# Allegro board HY_UART_422_V10_210901.brd
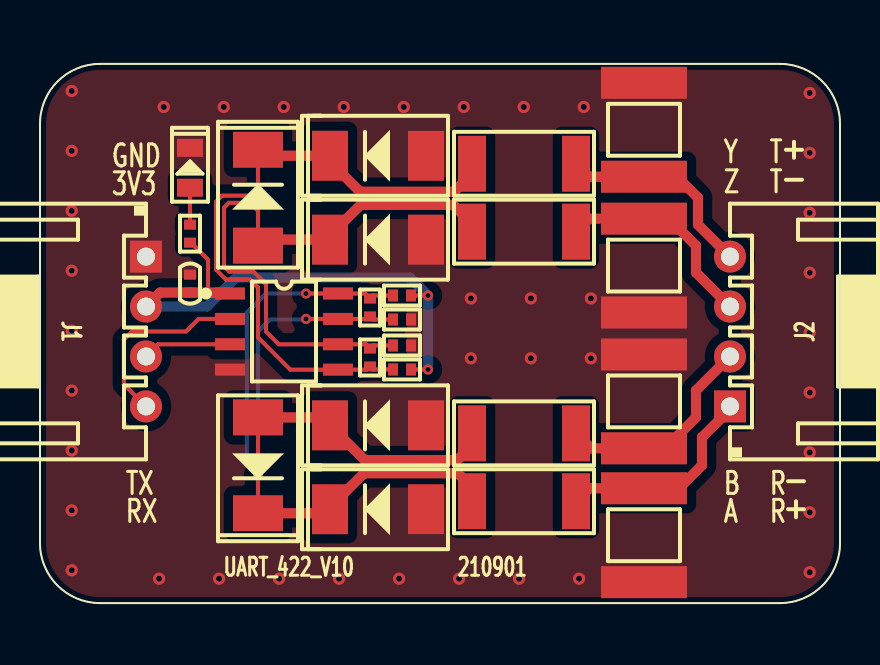
[diagram p0: board, top side]
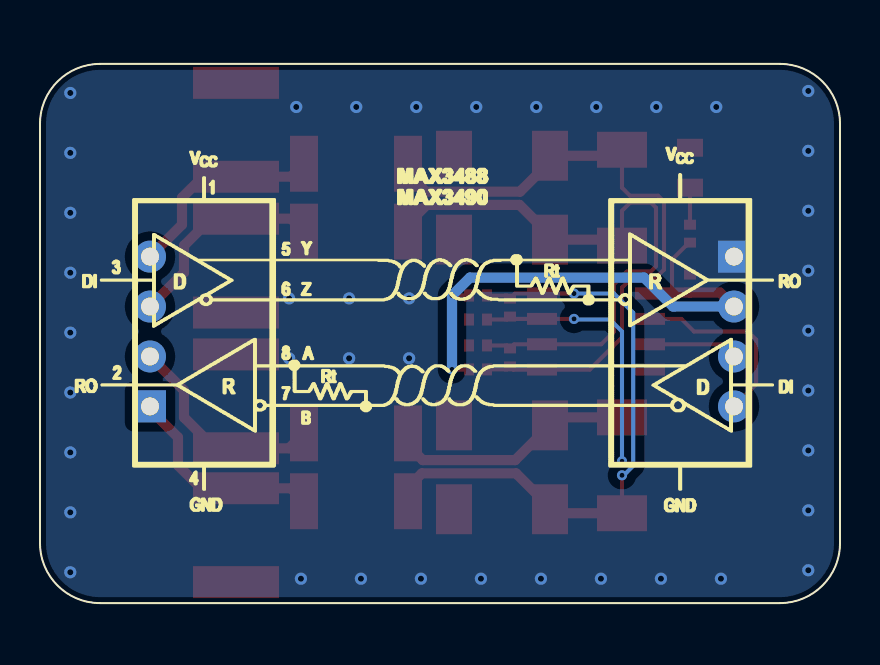
[diagram p1: board, bottom side, seen from below]

Outline 40 x 27 mm; copper layers: TOP, BOTTOM. Coordinates in mm from the lower left corner of the outline.
Outline path: 0,24 arc(0.88,26.12) 3,27 37,27 arc(39.12,26.12) 40,24 40,3 arc(39.12,0.88) 37,0 3,0 arc(0.88,0.88) 0,3 0,24

## Design rules (mm)
constraint set DEFAULT: min track width 0.203, pair gap 0.203

## Placement (name value [footprint] x y rotation side)
C1  100nF_50V  [C0402]  7.5 16 270 top
D1  GREEN-0805  [LED0805]  7.5 21.8 90 top
D2  SMBJ7.0CA  [DO-214AA]  16.9 8.9 0 top
D3  SMBJ7.0CA  [DO-214AA]  10.9 6.9 90 top
D4  SMBJ7.0CA  [DO-214AA]  16.9 4.7 0 top
D5  SMBJ7.0CA  [DO-214AA]  16.9 18.2 0 top
D6  SMBJ7.0CA  [DO-214AA]  10.9 20.3 270 top
D7  SMBJ7.0CA  [DO-214AA]  16.9 22.4 0 top
GDT1  4532-091-LF  [SMD4532]  30.2 10.1 90 top
GDT2  4532-091-LF  [SMD4532]  30.2 3.4 90 top
GDT3  4532-091-LF  [SMD4532]  30.2 16.9 270 top
GDT4  4532-091-LF  [SMD4532]  30.2 23.7 270 top
J1  -  [HX25035-4WA]  5.3 13.6 270 top
J2  -  [HX25035-4WA]  34.5 13.6 90 top
NOREF  -  []  0 0 90 top
NOREF#2  -  []  0 0 0 top
R1  4.7K  [R0402]  7.5 18.5 90 top
R2  10R  [R2010]  24.2 8.5 0 top
R3  4.7K  [R0402]  18.1 14.2 180 top
R4  120R/NI  [R0402]  16.5 14.8 90 top
R5  4.7K  [R0402]  18.1 15.4 0 top
R6  10R  [R2010]  24.2 5.1 0 top
R7  10R  [R2010]  24.2 18.6 0 top
R8  4.7K  [R0402]  18.1 12.9 180 top
R9  120R/NI  [R0402]  16.5 12.3 270 top
R10  4.7K  [R0402]  18.1 11.7 0 top
R11  10R  [R2010]  24.2 22 0 top
U1  MAX3488EESA  [SOIC8]  12.2 13.6 270 top

## Library data of the parts
C1 = CAP NP
D1 = LED_1
D2-D7 = P6SMB_1
GDT1-GDT4 = BA301N
J1 J2 = CONN RCPT 4
R1-R11 = R_Generic
U1 = MAX3485ESA_0

## Footprints (pads in the part's own frame, mm; a bottom-side part is the same pattern mirrored in y, then rotated)
C0402
  rect 0.5x0.6 smd: 1(-0.45,0) 2(0.45,0)
DO-214AA
  rect 1.8x2.5 smd: 1(2.4,0) 2(-2.4,0)
HX25035-4WA
  rect 1.6x1.6 hole 0.9: 1(-3.75,0)
  round 1.6 hole 0.9: 2(-1.25,0) 3(1.25,0) 4(3.75,0)
LED0805
  rect 0.9x1.3 smd: 1(-1,0) 2(1,0)
R0402
  rect 0.5x0.6 smd: 1(-0.45,0) 2(0.45,0)
R2010
  rect 1.4x2.8 smd: 1(-2.6,0) 2(2.6,0)
SMD4532
  rect 1.6x4.3 smd: 1(-2.349,0) 2(2.349,0)
SOIC8
  rect 0.6x1.5 smd: 1(-1.9,-2.7) 2(-0.63,-2.7) 3(0.64,-2.7) 4(1.91,-2.7) 5(1.91,2.7) 6(0.64,2.7) 7(-0.63,2.7) 8(-1.9,2.7)

## Nets
GND: C1.1 D1.2(CATHODE) D2.1 D4.1 D5.1 D7.1 GDT1.2 GDT2.1 GDT3.2 GDT4.1 J1.1 R3.1 R8.1 U1.4
VCC_3.3V: C1.2 J1.2 R1.1 R5.2 R10.2 U1.1
A: GDT2.2 J2.1 R6.2
B: GDT1.1 J2.2 R2.2
RS422_A: D3.2 D4.2 R4.2 R5.1 R6.1 U1.8
RS422_B: D2.2 D3.1 R2.1 R3.2 R4.1 U1.7
RS422_Y: D6.2 D7.2 R9.2 R10.1 R11.1 U1.5
RS422_Z: D5.2 D6.1 R7.1 R8.2 R9.1 U1.6(Z)
UART_RX: J1.4 U1.2
UART_TX: J1.3 U1.3
Y: GDT4.2 J2.4 R11.2
Z: GDT3.1 J2.3 R7.2
N174302151: D1.1 R1.2

## Via types
v1: diameter 0.508, hole 0.254, TOP to BOTTOM, 6 vias
v2: diameter 0.61, hole 0.305, TOP to BOTTOM, 40 vias

## Routing (per net, layer and track width the routed paths; a pad name or vN(x,y) marks a point on that pad's centre or on a via; arc(x,y) is an arc through that point)
GND:
  vias: v2(1.59,25.64) v2(1.59,22.64) v2(1.59,19.64) v2(1.59,16.64) v2(1.59,13.64) v2(1.59,10.64) v2(1.59,7.64) v2(1.59,4.64) v2(1.59,1.64) v2(5.95,1.22) v2(6.19,24.84) v2(8.95,1.22) v2(9.19,24.84) v2(11.95,1.22) v2(12.19,24.84) v2(14.95,1.22) v2(15.19,24.84) v2(17.95,1.22) v2(18.19,24.84) v2(20.95,1.22) v2(21.19,24.84) v2(21.54,15.26) v2(21.54,12.26) v2(23.95,1.22) v2(24.19,24.84) v2(24.54,15.26) v2(24.54,12.26) v2(26.95,1.22) v2(27.19,24.84) v2(27.54,15.26) v2(27.54,12.26) v2(38.49,25.54) v2(38.49,22.54) v2(38.49,19.54) v2(38.49,16.54) v2(38.49,13.54) v2(38.49,10.54) v2(38.49,7.54) v2(38.49,4.54) v2(38.49,1.54)
VCC_3.3V: length 27.9
  TOP w0.203: 8.4,15.55 8.4,17.2 7.55,18.05 R1.1 ; R5.2 v1(19.4,15.4) ; R10.2 v1(19.4,11.7)
  TOP w0.508: J1.2 6,15.55 C1.2 9.45,15.55 U1.1
  BOTTOM w0.508: v1(19.4,11.7) v1(19.4,15.4) 18.5,16.3 9.8,16.3 8.35,14.85 J1.2
A: length 10.6
  TOP w0.508: J2.1 34.5,9.7 33.1,8.3 33.1,6.9 31.95,5.75 GDT2.2 27.45,5.75 R6.2
B: length 10.7
  TOP w0.508: J2.2 32.8,10.65 32.8,9.3 31.25,7.75 GDT1.1 27.55,7.75 R2.2
RS422_A: length 30.8
  TOP w0.203: D3.2 v1(10.9,6.4) ; R5.1 16.65,15.4 R4.2 16.25,15.5 U1.8 v1(13.3,15.5)
  TOP w0.508: D3.2 14.3,4.5 D4.2 14.5,4.8 16.2,6.5 20.9,6.5 21.6,5.8 R6.1
  BOTTOM w0.203: v1(10.9,6.4) 10.81,6.4 10.34,6.87 10.34,14.54 11.3,15.5 v1(13.3,15.5)
RS422_B: length 28.3
  TOP w0.203: D3.1 v1(10.9,7.1) ; R3.2 16.65,14.2 R4.1 16.38,14.23 U1.7 v1(13.3,14.23)
  TOP w0.508: D3.1 14.1,9.3 D2.2 16.24,7.16 20.86,7.16 21.6,7.9 R2.1
  BOTTOM w0.203: v1(10.9,7.1) 10.9,13.6 11.5,14.2 13.27,14.2 v1(13.3,14.23)
RS422_Y: length 32.8
  TOP w0.203: D6.2 10.9,20.8 10.5,20.4 9.1,20.4 8.8,20.1 8.8,16.7 9.3,16.2 10.5,16.2 10.9,15.8 10.9,13.3 12.51,11.69 U1.5 16.34,11.69 R9.2 16.65,11.7 R10.1
  TOP w0.508: R11.1 21.6,21.5 20.7,20.6 16,20.6 14.5,22.1 D7.2 11.2,22.4 D6.2
RS422_Z: length 30.7
  TOP w0.203: D6.1 10.9,19.64 10.5,20.04 9.44,20.04 9.2,19.8 9.2,16.87 9.47,16.6 10.67,16.6 11.3,15.97 11.3,13.6 11.94,12.96 U1.6 16.29,12.96 R9.1 16.65,12.9 R8.2
  TOP w0.508: R7.1 21.6,19 20.66,19.94 16.03,19.94 14.5,18.41 D5.2 11.2,18.2 D6.1
UART_RX: length 9.5
  TOP w0.203: U1.2 7.93,14.23 7.3,13.6 4.6,13.6 4.2,13.2 4.2,10.95 J1.4
UART_TX: length 4.5
  TOP w0.203: J1.3 5.91,12.96 U1.3
Y: length 10.4
  TOP w0.508: R11.2 27.45,21.35 GDT4.2 31.85,21.35 32.9,20.3 32.9,18.95 J2.4
Z: length 10.6
  TOP w0.508: R7.2 27.45,19.25 GDT3.1 31.45,19.25 32.8,17.9 32.8,16.55 J2.3
N174302151: length 1.9
  TOP w0.203: R1.2 D1.1

## Copper pours and planes (outline as drawn; the poured copper is in the pictures)
GND on TOP: 37,26.7 38.91,25.91 39.7,24 39.7,3 38.91,1.09 37,0.3 3,0.3 1.09,1.09 0.3,3 0.3,24 1.09,25.91 3,26.7 ; 3 cut-outs
GND on BOTTOM: 37,26.7 38.91,25.91 39.7,24 39.7,3 38.91,1.09 37,0.3 3,0.3 1.09,1.09 0.3,3 0.3,24 1.09,25.91 3,26.7

## Text on the board
Ref Des/Silkscreen Top: UART_422_V10 | 210901 | GND | 3V3 | TX | RX | Y | Z | B | A | T | R
DISPLAY_TOP: FIGURE | FINISHED_SIZE | 0.254 | 0.3048 | 0.9 | DRILL CHART: TOP to BOTTOM | ALL UNITS ARE IN MILLIMETERS | PLATED | QTY | 6 | 40 | 8 | 54 | TOTAL HOLES:
